# Altium PCB OpAMP.PcbDoc
Units mm, origin at the board's own origin, x right, y up, seen from the top; angles counter-clockwise.
Board outline 26.81 x 18.54 mm, 2 copper layers (Top Layer, Bottom Layer); 10 components, 9 nets, 30 pads, 0 vias.
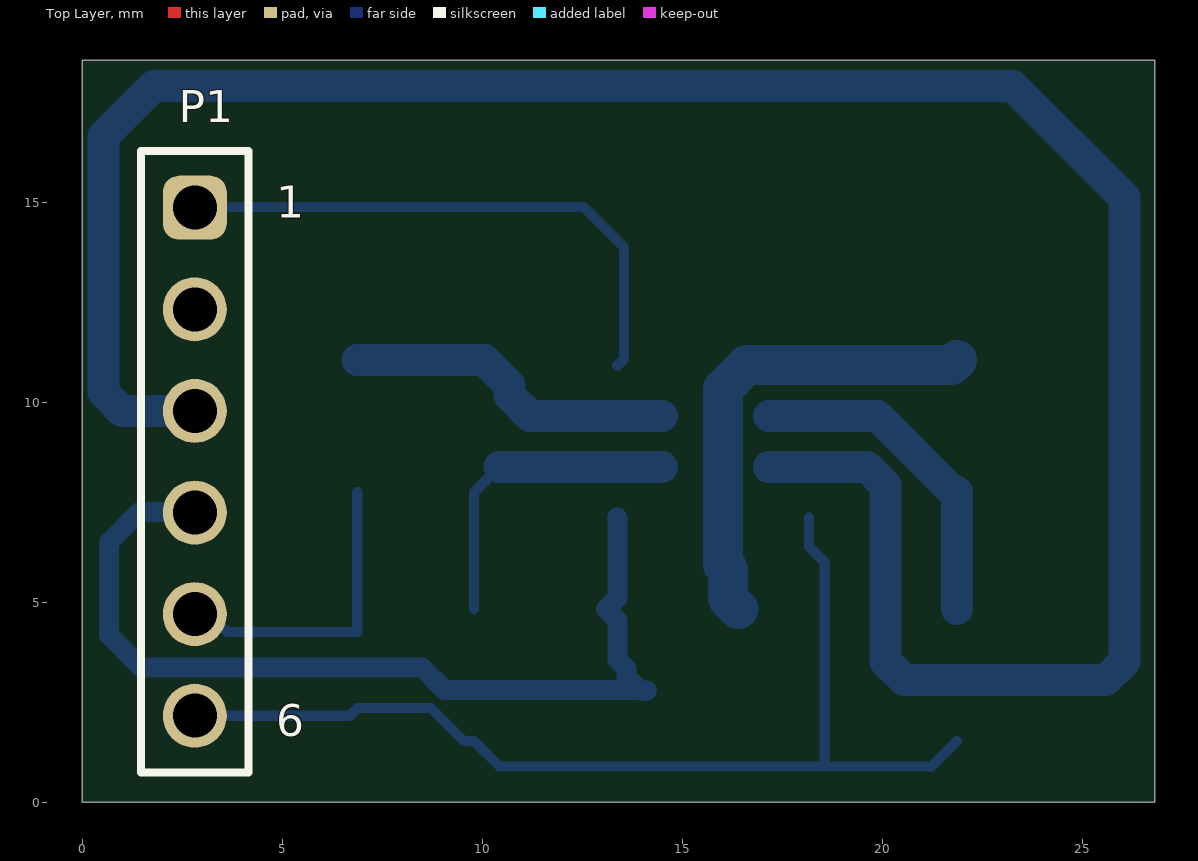
[diagram p0: Top Layer view]
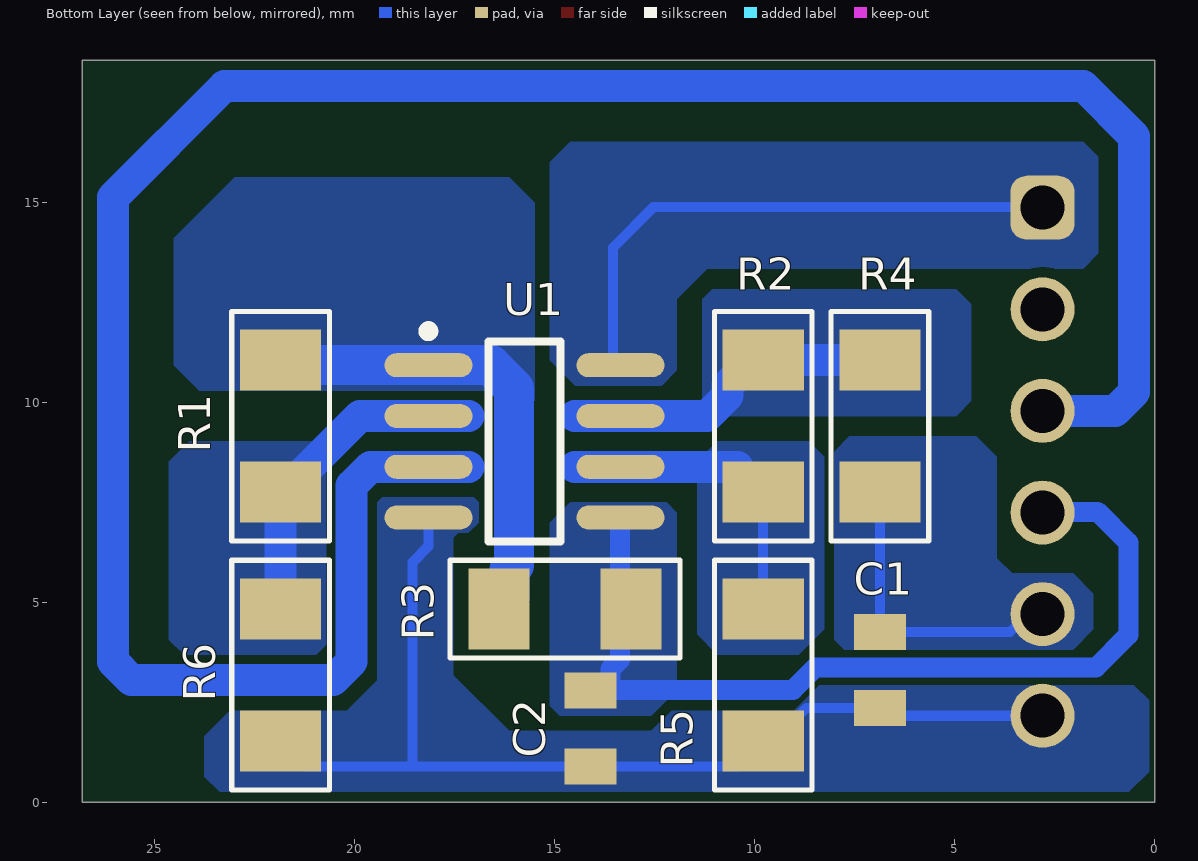
[diagram p1: Bottom Layer view, seen from below]
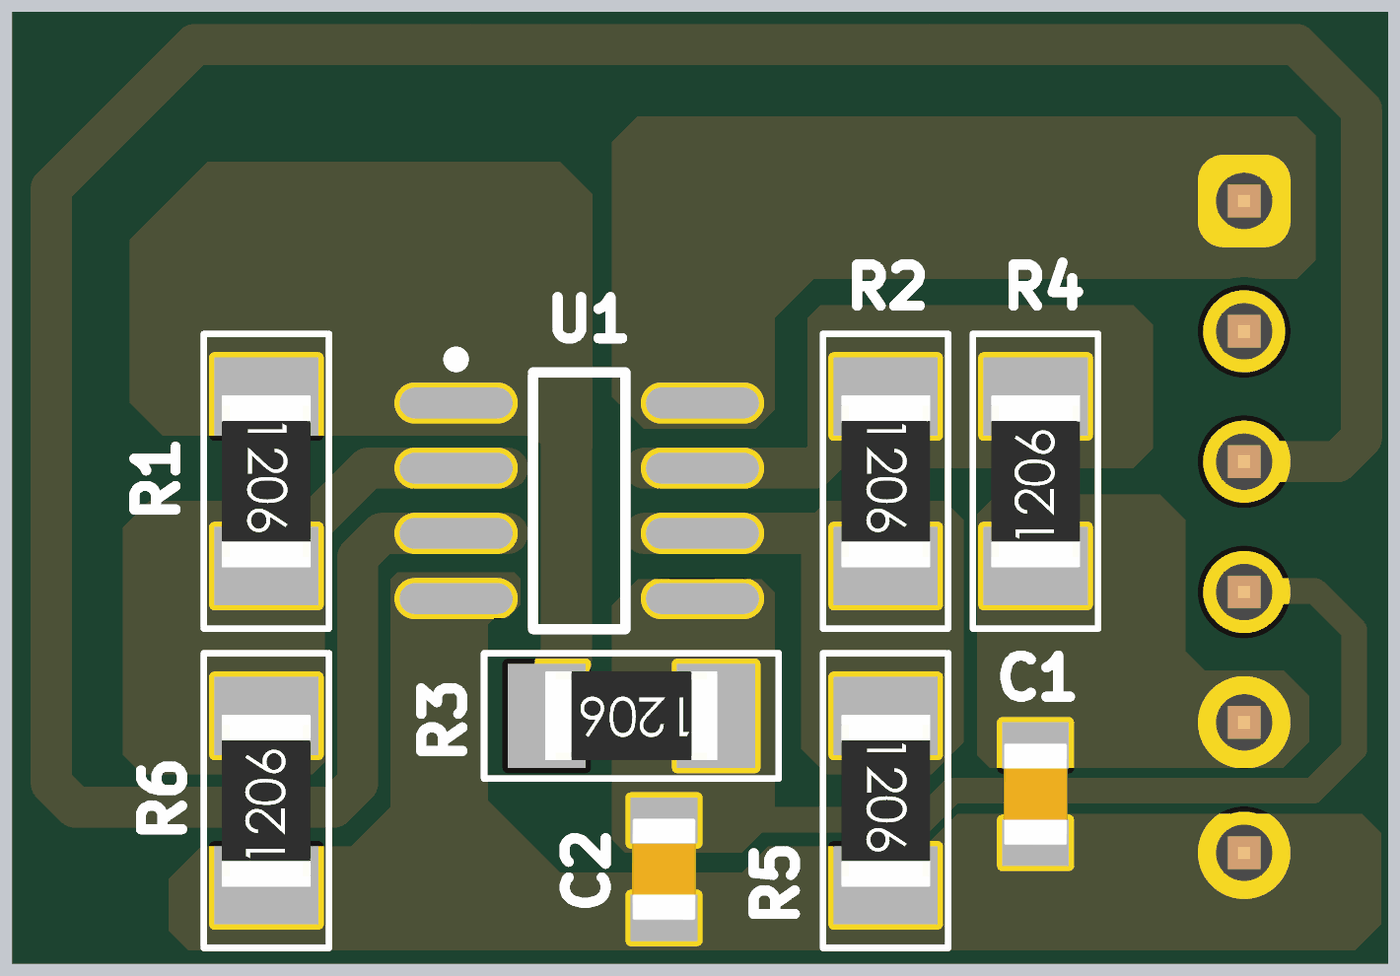
[diagram p2: 3D render of the assembled board from below, using the file's embedded part models]

## Layer stack, top to bottom
Top Solder: solder mask 0.0102, Solder Resist, Dk 3.5
Top Layer: signal copper 0.0356
Dielectric 1: dielectric 0.32, FR-4, Dk 4.8
Bottom Layer: signal copper 0.0356
Bottom Solder: solder mask 0.0102, Solder Resist, Dk 3.5

## Board outline
-0.015,0 26.797,0 26.797,18.542 -0.015,18.542

## Design rules (kind name [scope] priority, off if disabled: settings)
Clearance [All] p1: gap=0.254 ignorepadtopadclearanceinfootprint=FALSE except(0: Arc-Hole Track-Hole SMDPad-Hole THPad-Hole Via-Hole Fill-Hole Poly-Hole Region-Hole Text-Hole; 0.1: Arc-Arc Arc-Track Arc-SMDPad Arc-THPad Arc-Via Arc-Fill Arc-Poly Arc-Region Arc-Text Track-Track Track-SMDPad Track-THPad Track-Via Track-Fill Track-Poly Track-Region Track-Text)
PlaneConnect [All] p1: planeconnectstyle=Direct reliefexpansion=0.508 reliefentries=4 reliefconductorwidth=0.254 reliefairgap=0.254
PolygonConnect [All] p1: connectstyle=Direct reliefconductorwidth=0.254 reliefentries=4 polygonreliefangle="90 Angle" airgapwidth=0.254
RoutingVias [All] p1: holewidth=0.711 width=1.27 viastyle="Through Hole" minholewidth=0.711 minwidth=1.27 maxholewidth=0.711 maxwidth=1.27
SolderMaskExpansion [All] p1: expansion=0.102 istentingtop=FALSE
Width [All] p1: maxlimit=15 minlimit=0.254 preferedwidth=0.254 minimp=50.000000 maximp=50.000000 favimp=50.000000
29 further rules are at their usual default settings.

## Components (designator, comment, footprint, x,y, rotation, side; value= is the part's Value field where it differs from the comment)
C1 "TBD" WCAP-CSGP_0805_L2W1.25H0.6_Reflow 6.858,3.302 r90 bottom
C2 "TBD" WCAP-CSGP_0805_L2W1.25H0.6_Reflow 14.097,1.839 r90 bottom
P1 "61300611121" 61300611121 2.794,8.509 r270 top
R1 "TBD" SM/R_1206 21.844,9.398 r270 bottom
R2 "0R" SM/R_1206 9.779,9.398 r270 bottom
R3 "TBD" SM/R_1206 14.732,4.826 r0 bottom
R4 "SMRes" SM/R_1206 6.858,9.398 r90 bottom
R5 "NM" SM/R_1206 9.779,3.175 r270 bottom
R6 "TBD" SM/R_1206 21.844,3.175 r90 bottom
U1 "LM2904" SO8_N 15.748,9.017 r180 bottom

## Footprints (in the part's own frame and the unit in brackets; to place one, negate y for a bottom-side part, rotate by r counter-clockwise, add the part's x,y. Pads: shape width x height; smd on the part's side, far side on the other; paste and mask are expansions set on the pad)
61300611121 [mm] "Pin Header, pitch 2.54 mm, THT, Vertical, single row, 6p"
  rrect50% 1.6x1.6 hole 1.1: 1(-6.35,0)
  round 1.6 hole 1.1: 2(-3.81,0) 3(-1.27,0) 4(1.27,0) 5(3.81,0) 6(6.35,0)
  silkscreen extent -7.77,-1.35 7.77,1.35, body extent -7.62,-1.27 7.62,1.27, height 8.57
SM/R_1206 [mil]
  rect 60x80 smd: 1(-65,0) 2(65,0)
  silkscreen extent -113,-48 113,48, body extent -66,-34 66,34, height 33
SO8_N [mm] "SOIC, 8-Leads, Body 4.9x3.9mm, Pitch 1.27mm, IPC Medium Density"
  oval 2.2x0.6 smd: 1(-2.4,1.905) 2(-2.4,0.635) 3(-2.4,-0.635) 4(-2.4,-1.905) 5(2.4,-1.905) 6(2.4,-0.635) 7(2.4,0.635) 8(2.4,1.905)
  silkscreen extent -2.53,-2.5 0.9,2.88, body extent -1.95,-2.45 1.95,2.45, height 1.75
WCAP-CSGP_0805_L2W1.25H0.6_Reflow [mm] "Ceramic Capacitors, body 2x1.25mm"
  rect 0.9x1.3 smd: 1(-0.95,0) 2(0.95,0)
  body extent -1,-0.63 1,0.62, height 0.6

## Part data
C1 C2: library part 885012007032, "WCAP-CSGP Multilayer Ceramic Chip Capacitor, General Purpose, size 0805, NP0, 47pF, 25VDC", Capacitance=47pF, Capacitance Tolerance=+/-5%, Case/Size Code=0805, Insulation Resistance=10GΩ, Manufacturer="Wurth Elektronik", Operating Temperature Max=125°C, Operating Temperature Min=-55°C, Rated Voltage (DC)=25V, Category="Multilayer Ceramic Chip Capacitors", Ceramic Type=NP0, ComponentLink1Description="Website Link", ComponentLink1URL=https://www.we-online.com/redexpert/article/885012007032?ad, ComponentLink2Description="Datasheet Link", ComponentLink2URL=https://www.we-online.com/redexpert/spec/885012007032?ad, Height=0.6mm, Length=2mm, Manufacturer Part Number=885012007032, Match Code=WCAP-CSGP, Mount="Surface Mount", Packaging="Tape and Reel", Q Factor=1000, Technical Reference=NP00805470J025DFCT10000, Width=1.25mm
P1: "WR-PHD Pin Header, THT, Vertical, pitch 2.54mm, 1 Row, 6P", Contact Resistance=20mΩ, Manufacturer="Wurth Elektronik", Operating Temperature Max=105°C, Operating Temperature Min=-40°C, Rated Current=3A, Withstanding Voltage=500V, Working Voltage=250V, Category="Board-to-Board Connectors", ComponentLink1Description="Website Link", ComponentLink1URL=https://www.we-online.com/redexpert/article/61300611121?ad, ComponentLink2Description="Datasheet Link", ComponentLink2URL=https://www.we-online.com/redexpert/spec/61300611121?ad, Gender="Pin Header", Manufacturer Part Number=61300611121, Match Code=WR-PHD, Mount="Through Hole", Number of Pins=6, Number of Rows=1, Orientation=Vertical, Packaging=Bag, Pitch=2.54mm
R1 R2 R3 R5 R6: library part SMRes, "SMD Resistor", Resistor Type="FIXED RESISTOR", Category="Chip SMD Resistors", Mount="Surface Mount", Mounting=SMD, Number of Pins=2, Pricing 1="10=0.67400, 100=0.52000, 250=0.49300, 500=0.33100, 1000=0.28900 (USD)", RoHS=Yes, Stock 1=1
R4: "SMD Resistor", Resistor Type="FIXED RESISTOR", Category="Chip SMD Resistors", Mount="Surface Mount", Mounting=SMD, Number of Pins=2, Pricing 1="10=0.67400, 100=0.52000, 250=0.49300, 500=0.33100, 1000=0.28900 (USD)", RoHS=Yes, Stock 1=1
U1: library part LM2903D, "Low-Power Dual Voltage Comparator", Code_IPC=SOIC127P600-8, Code_JEDEC=MS-012-AA, ComponentLink1Description="Manufacturer Link", ComponentLink1URL=http://www.st.com/, ComponentLink2Description=Datasheet, ComponentLink2URL=http://www.st.com/stonline/products/literature/ds/2470/lm2903.pdf, DatasheetVersion=Oct-1999, LatestRevisionDate=13-Apr-2006, LatestRevisionNote="IPC-7351 Footprint Added.", PackageDescription="8-Pin Small Outline Integrated Circuit 1.27 mm Pitch", PackageReference=SO8, PackageVersion=Dec-2002, Published=24-Aug-2001, Publisher="Altium Limited"

## Nets (pads, with @x,y where several pads share a name; then routed paths per layer and width w, separated by ;. In a path a pad name is that pad's centre, name@x,y a point inside that pad or via, vN(x,y) a via of type N, cw(c..) or ccw(c..) an arc to the next point about the centre after c; other vN are vias at no path point)
+24: P1.1 U1.8 | length 14.2
  Bottom Layer w0.254: P1.1 2.814,14.879 12.512,14.879 13.528,13.863 13.528,11.082 13.368,10.922 U1.8
NetR1_1: R1.1 R3.2 U1.1 | length 11.8
  Bottom Layer w1: R3.2 16.121,5.088 16.121,5.809 16.002,5.928 16.002,10.336 16.588,10.922 21.717,10.922 R1.1
NetR1_2: R1.2 R6.2 U1.2 | length 8.4
  Bottom Layer w0.8: U1.2@17.145,9.652 U1.2 19.862,9.652 21.767,7.747 R1.2 R6.2
NetR2_1: R2.1 R4.2 U1.7 | length 8.3
  Bottom Layer w0.8: R4.2 R2.1 10.033,11.049 10.668,10.414 10.668,10.16 11.176,9.652 U1.7 14.478,9.652
NetR2_2: R2.2 R5.1 U1.6 | length 7.9
  Bottom Layer w0.254: R5.1 R2.2 R2.2@10.414,8.382
  Bottom Layer w0.8: R2.2@10.414,8.382 U1.6 14.478,8.382
OUT1: C2.2 P1.4 R3.1 U1.5 | length 23.6
  Bottom Layer w0.5: P1.4 2.776,7.257 1.415,7.257 0.65,6.492 0.65,4.176 1.46,3.366 8.475,3.366 9.035,2.807 C2.2@13.897,2.807 ; U1.5 13.363,7.097 13.363,5.108 R3.1 13.363,4.544 13.363,3.556 13.589,3.33 13.589,3.13 13.904,2.814 C2.2@13.912,2.807 ; C2.2@13.912,2.789 C2.2
OUT2: C1.2 P1.5 R4.1 | length 7.7
  Bottom Layer w0.254: P1.5 3.158,4.699 3.605,4.252 C1.2 R4.1
Signal_Input: P1.3 U1.3 | length 61.5
  Bottom Layer w0.8: P1.3 0.977,9.779 0.508,10.248 0.508,16.637 1.778,17.907 23.241,17.907 26.035,15.113 26.035,3.517 25.566,3.048 20.535,3.048 20.066,3.517 20.066,7.913 19.597,8.382 U1.3 U1.3@17.145,8.382
Signal_Ref: C1.1 C2.1 P1.6 R5.2 R6.1 U1.4 | length 26.4
  Bottom Layer w0.254: P1.6 6.665,2.159 C1.1 8.697,2.352 9.525,1.524 R5.2 10.414,0.889 C2.1 18.542,0.889 ; U1.4 18.148,6.394 18.542,6 18.542,0.889 ; R6.1 21.209,0.889 18.542,0.889
pads on no net: P1.2

## Polygon pours and split planes (outlines as drawn)
+24 on Bottom Layer "+24_L02_P007" (solid, pour order 7): 11.176,13.335 11.938,12.573 11.938,10.795 12.319,10.414 14.478,10.414 15.113,11.049 15.113,16.002 14.605,16.51 14.351,16.51 1.778,16.51 1.397,16.129 1.397,13.716 1.778,13.335
NetR2_1 on Bottom Layer "NETR2_1_L02_P006" (solid, pour order 6): 11.303,12.573 11.303,9.906 11.049,9.652 4.953,9.652 4.572,10.033 4.572,12.446 4.953,12.827 11.049,12.827
OUT2 on Bottom Layer "OUT2_L02_P005" (solid, pour order 5): 3.937,6.096 3.556,5.715 2.032,5.715 1.524,5.207 1.524,4.318 2.032,3.81 4.318,3.81 7.747,3.81 8.001,4.064 8.001,8.763 7.62,9.144 4.445,9.144 3.937,8.636
NetR1_1 on Bottom Layer "NETR1_1_L02_P004" (solid, pour order 4): 16.383,15.621 16.129,15.621 15.494,14.986 15.494,10.033 16.383,10.033 16.383,10.287 23.876,10.287 24.511,10.922 24.511,14.097 22.987,15.621
NetR1_2 on Bottom Layer "NETR1_2_L02_P003" (solid, pour order 3): 20.955,9.017 24.13,9.017 24.638,8.509 24.638,4.064 24.257,3.683 20.955,3.683 20.701,3.937 20.701,8.763
NetR2_2 on Bottom Layer "NETR2_2_L02_P002" (solid, pour order 2): 8.636,9.017 10.922,9.017 11.43,8.509 11.43,4.191 10.922,3.683 8.89,3.683 8.255,4.318 8.255,8.636
OUT1 on Bottom Layer "OUT1_L02_P001" (solid, pour order 1): 12.192,7.493 14.605,7.493 15.113,6.985 15.113,2.413 14.859,2.159 12.573,2.159 11.938,2.794 11.938,7.239
Signal_Ref on Bottom Layer "SIGNAL_REF_L02_P000" (solid, pour order 0): 0.127,2.54 0.508,2.921 8.382,2.921 9.017,2.286 12.065,2.286 12.573,1.778 16.129,1.778 17.526,3.175 17.526,6.604 17.399,6.731 17.145,6.731 16.891,6.985 16.891,7.493 17.018,7.62 19.304,7.62 19.431,7.493 19.431,3.048 20.193,2.286 23.114,2.286 23.749,1.651 23.749,0.635 23.368,0.254 0.635,0.254 0.127,0.762

## Silkscreen, mask and mechanical layers (free items; w line width, h text height)
Mechanical 1:
  lines w0.01: 0,0 0,18.542 26.797,18.542 26.797,0 0,0

## Text inside footprints (layer, text, board x,y; h text height)
P1: Top Overlay "6" at 4.826,1.651 h0.8; Top Overlay "1" at 4.826,14.605 h0.8